# Altium PCB moto.PcbDoc
Units mil, origin at the board's own origin, x right, y up, seen from the top; angles counter-clockwise.
Board outline 6000 x 4000 mil, 2 copper layers (Top Layer, Bottom Layer); 13 components, 13 nets, 39 pads, 5 vias.
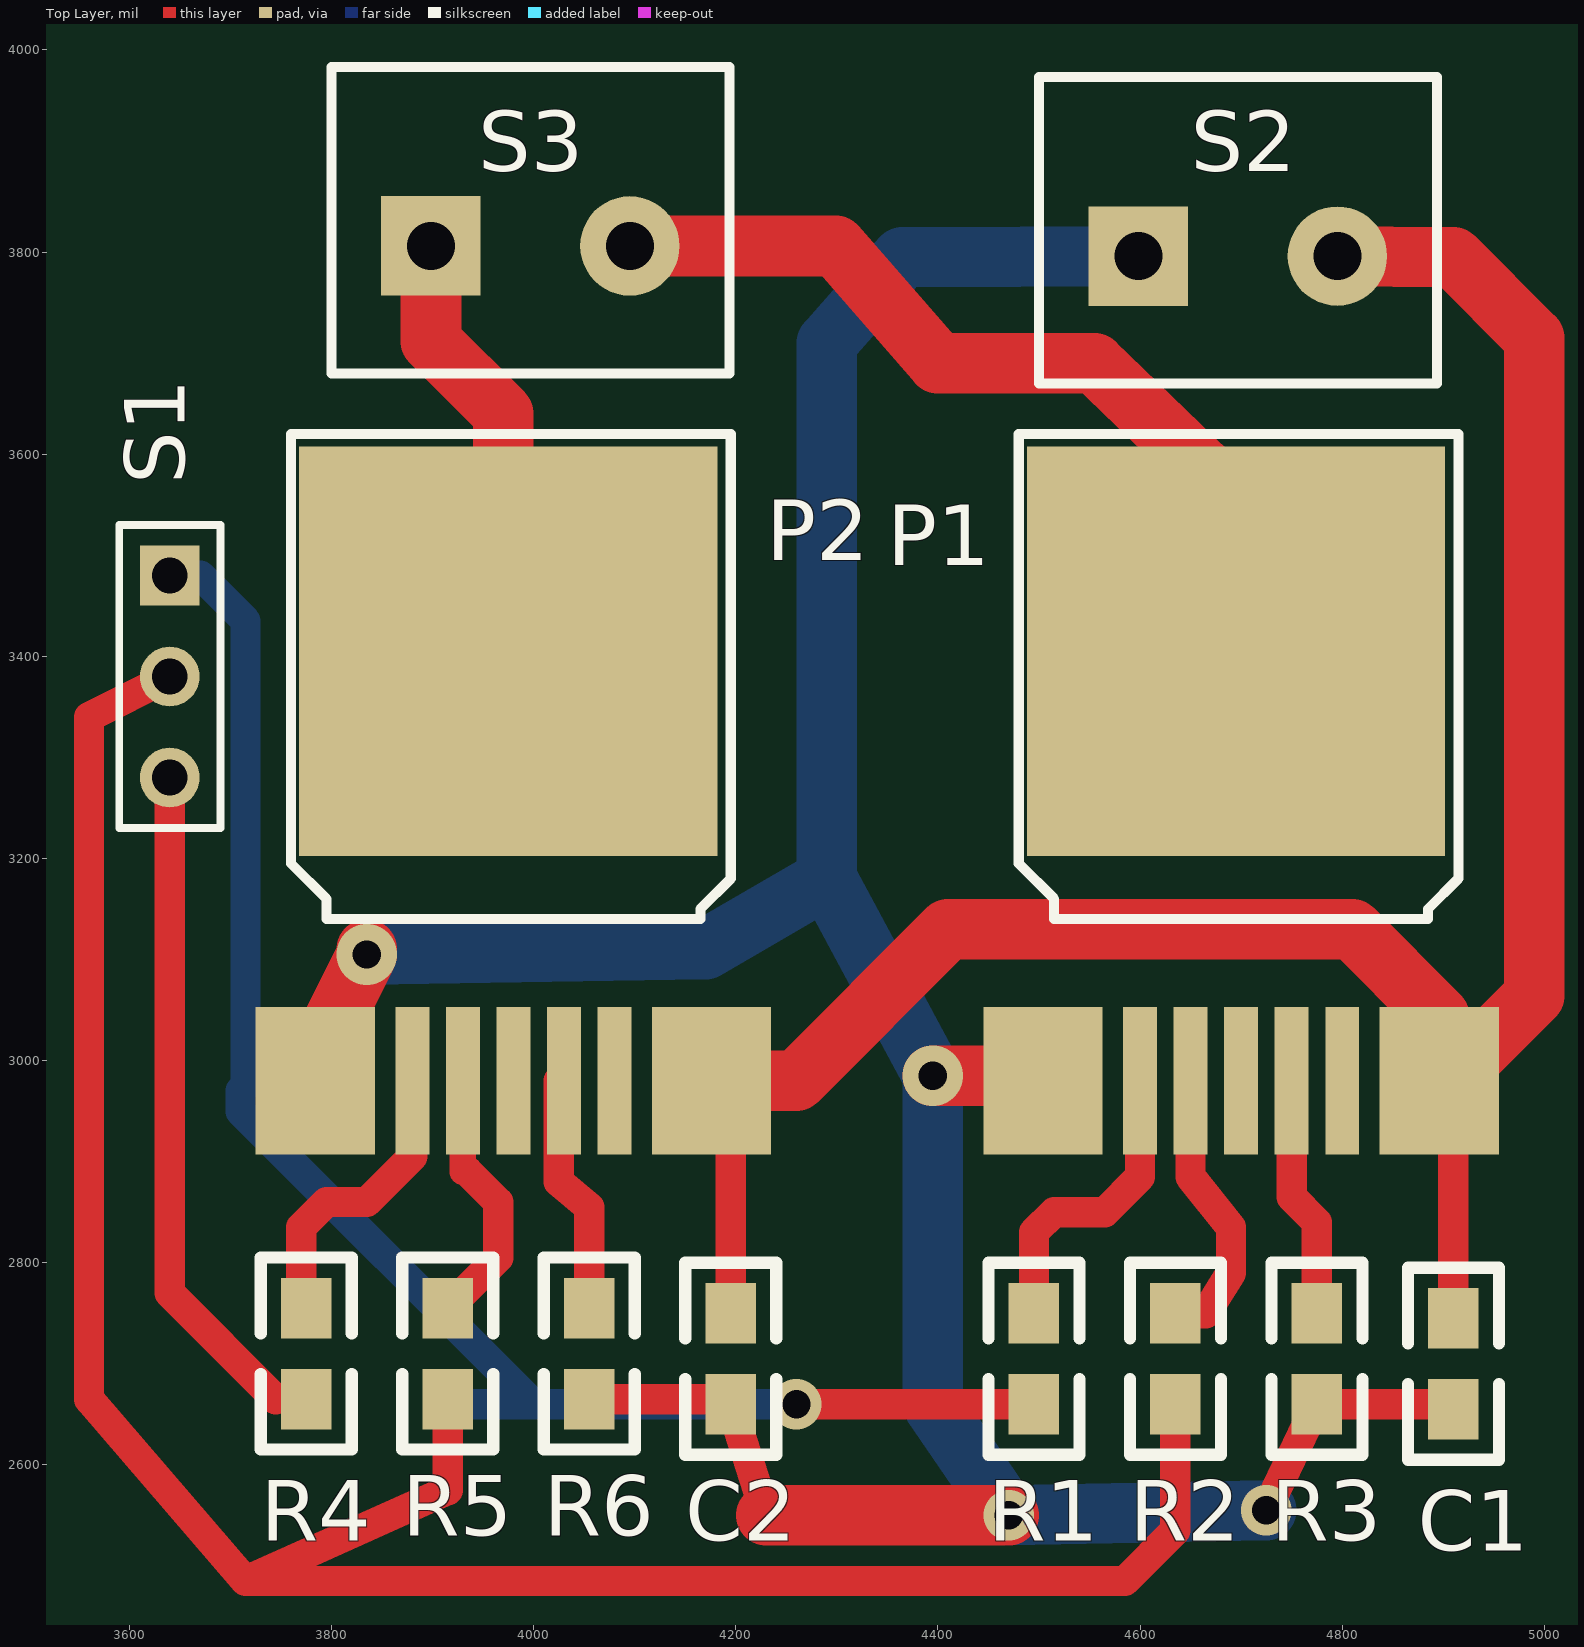
[diagram p0: Top Layer view]
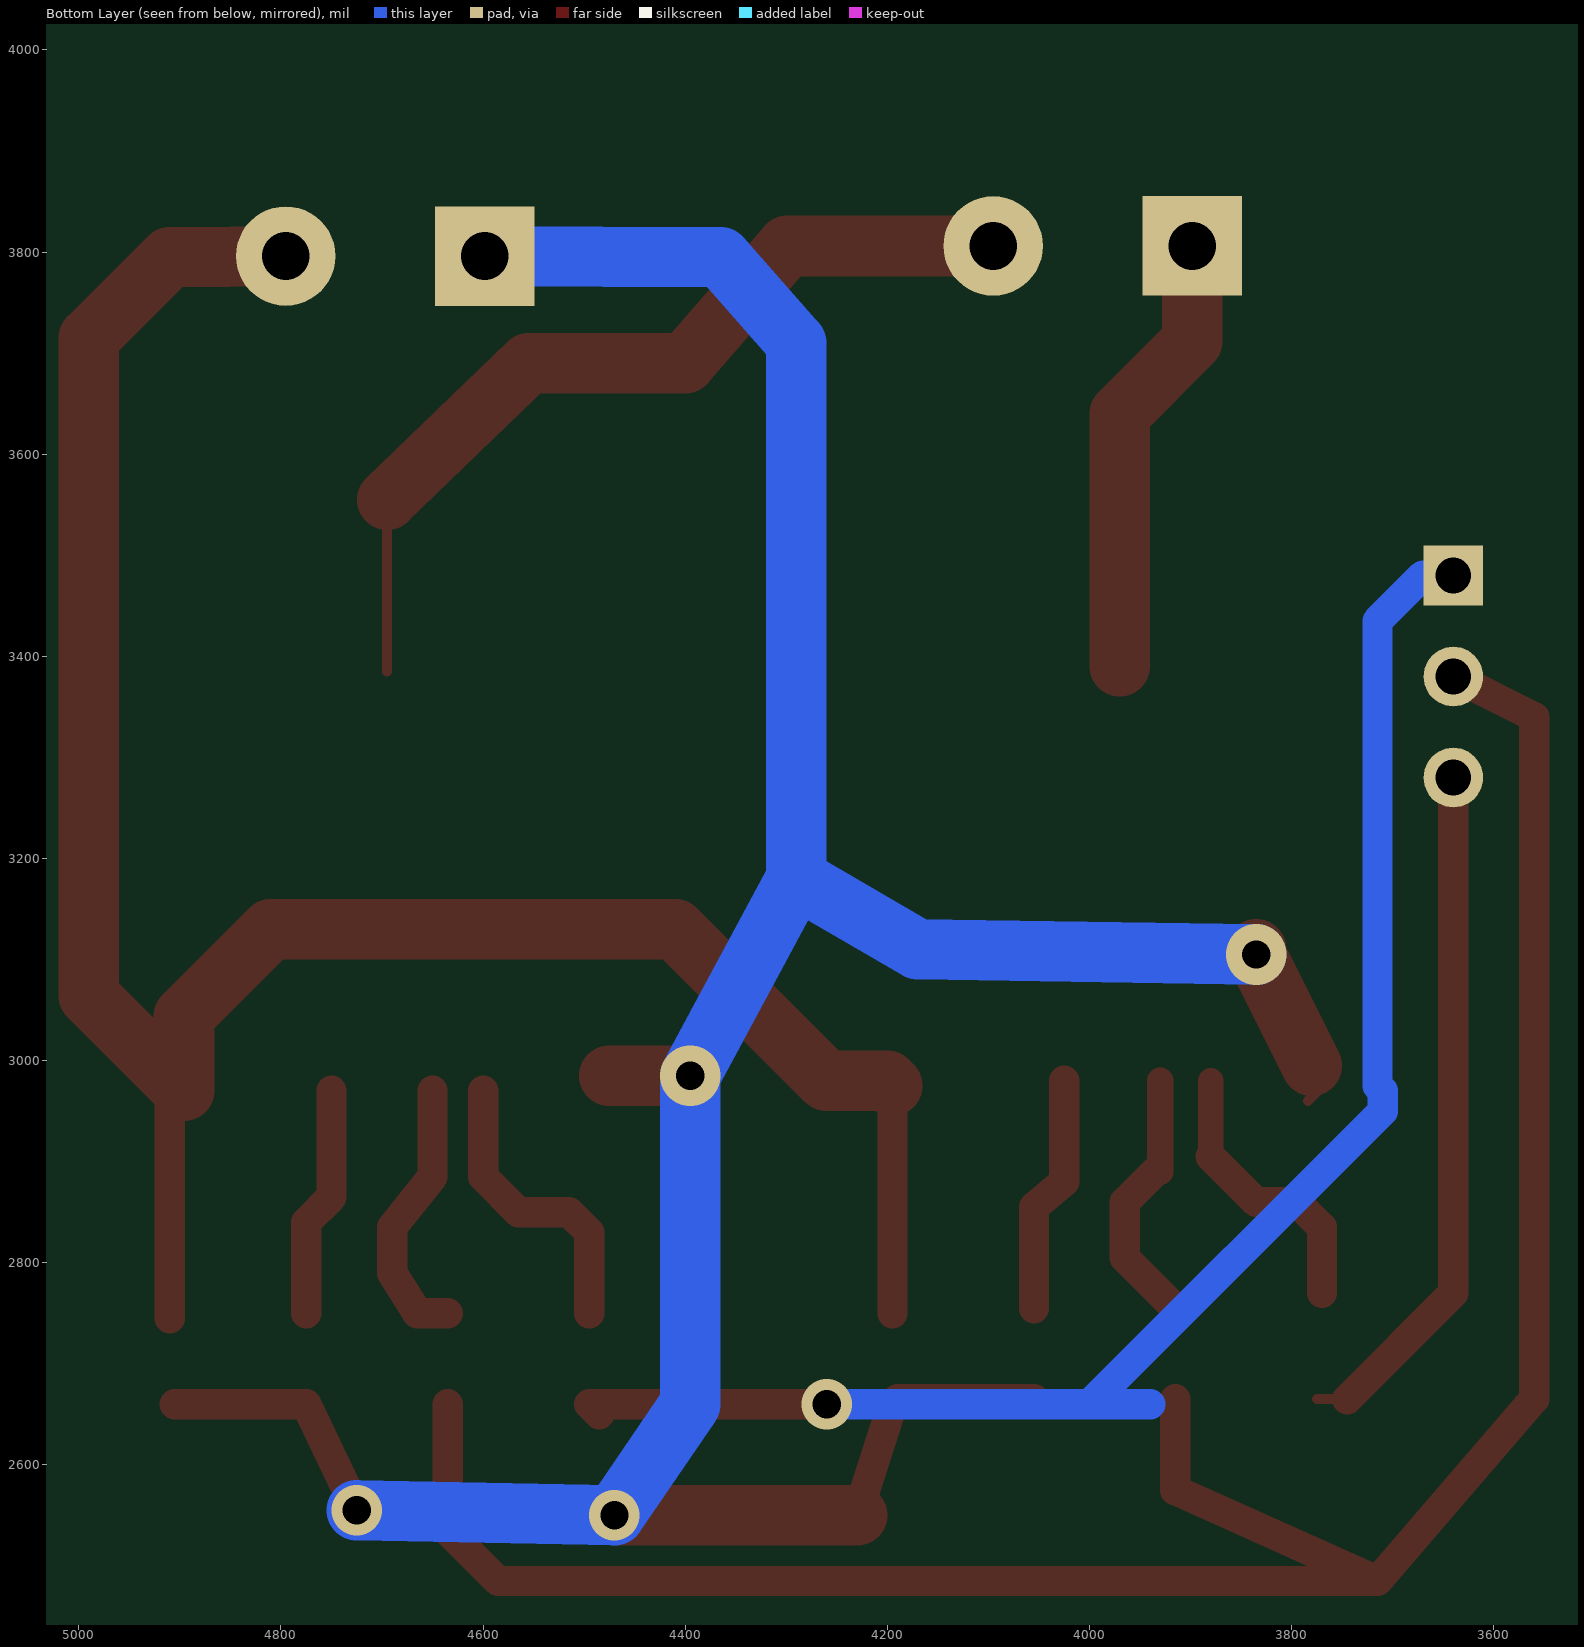
[diagram p1: Bottom Layer view, seen from below]

## Layer stack, top to bottom
Top Layer: signal copper 1.4
Dielectric: dielectric 12.6, FR-4, Dk 4.8
Bottom Layer: signal copper 1.4

## Board outline
1000,1000 7000,1000 7000,5000 1000,5000

## Design rules (kind name [scope] priority, off if disabled: settings)
Clearance Clearance_1 [All] p1: gap=10
Clearance [All] p2: gap=10
ComponentClearance [All] p1: gap=10 collisioncheckmode=3 verticalgap=10
PolygonConnect [All] p1: connectstyle=Relief reliefconductorwidth=10 reliefentries=4 polygonreliefangle="90 Angle"
RoutingVias [All] p1: holewidth=28 width=50 viastyle="Through Hole" minholewidth=28 minwidth=50 maxholewidth=28 maxwidth=50
SolderMaskExpansion [All] p1: expansion=4
TestPointUsage [All] p1: valid=0 allowmultiple=FALSE
Testpoint [All] p1: side=15 testpointundercomponent=TRUE minsize=40 maxsize=100 preferedsize=60 minholesize=0 maxholesize=40 preferedholesize=32 testpointgrid=1 style=1023 order=0123456789
Width [All] p1: maxlimit=70 minlimit=10 preferedwidth=10 toplayer_prefwidth=60 bottomlayer_prefwidth=30 minimp=50.000000 maximp=50.000000 favimp=50.000000
17 further rules are at their usual default settings.

## Components (designator, comment, footprint, x,y, rotation, side; value= is the part's Value field where it differs from the comment)
C1 "470nF" 0805 4910,2655 r90 top
C2 "470nF" 0805 4195,2660 r90 top
P1 "BTS7960" BTS7970B 4700,2980 r0 top
P2 "BTS7960" BTS7970B 3980,2980 r0 top
R1 "10K" 0805 4495,2660 r90 top
R2 "10K" 0805 4635,2750 r270 top
R3 "5.1K" 0805 4775,2750 r270 top
R4 "10K" 0805 3775,2665 r90 top
R5 "10K" 0805 3915,2755 r270 top
R6 "5.1K" 0805 4055,2755 r270 top
S1 "信号输入" HDR1X3 3640,3480 r270 top
S2 "电源" tongzhu 4500,3670 r0 top
S3 "电机" tongzhu 3800,3680 r0 top

## Footprints (in the part's own frame and the unit in brackets; to place one, negate y for a bottom-side part, rotate by r counter-clockwise, add the part's x,y. Pads: shape width x height; smd on the part's side, far side on the other; paste and mask are expansions set on the pad)
0805 [mil]
  rect 60x50 smd: 1(0,0) 2(90,0)
  silkscreen extent -50,-45 140,45
BTS7970B [mm]
  rect 3x3.7 smd: 1(-4.978,0) 7(4.978,0)
  rect 0.85x3.7 smd: 2(-2.54,0) 3(-1.27,0) 4(0,0) 5(1.27,0) 6(2.54,0)
  rect 10.514x10.3 smd: 8(-0.127,10.795)
  silkscreen extent -5.59,4.06 5.46,16.26
HDR1X3 [mm] "Connector; Header; 3 Position"
  rect 1.5x1.5 hole 0.9: 1(0,0)
  round 1.5 hole 0.9: 2(2.54,0) 3(5.08,0)
  silkscreen extent -1.27,-1.27 6.35,1.27
tongzhu [mm]
  rect 2.5x2.5 hole 1.2: 1(2.5,3.2)
  round 2.5 hole 1.2: 2(7.5,3.2)
  silkscreen extent 0,0 10,7.7

## Part data
C1 C2: library part Cap, "Capacitor"
P1 P2: library part "Header 8", "Header, 8-Pin"
R1 R2 R3 R4 R5 R6: library part Res2, "Resistor"
S1: library part "Header 3", "Header, 3-Pin"
S2 S3: library part "Header 2", "Header, 2-Pin"

## Via types
v1: diameter 50, hole 28, Top Layer to Bottom Layer, 3 vias
v2: diameter 60, hole 28, Top Layer to Bottom Layer, 2 vias

## Nets (pads, with @x,y where several pads share a name; then routed paths per layer and width w, separated by ;. In a path a pad name is that pad's centre, name@x,y a point inside that pad or via, vN(x,y) a via of type N, cw(c..) or ccw(c..) an arc to the next point about the centre after c; other vN are vias at no path point)
GND: C1.1 C2.1 P1.1 P2.1 R3.2 R6.2 S2.1 | length 3247.8
  Top Layer w10: P2.1@3775,2969 P2.1@3784,2960 ; C2.1@4195,2655 C2.1
  Top Layer w30: R6.2 C2.1@4190,2665 ; C2.1 4230,2550 ; v1(4725,2555) R3.2 C1.1@4905,2660
  Top Layer w60: P2.1@3780,2995 v2(3835,3105) v2@3835,3110 ; 4230,2550 v1(4470,2550) ; v2(4395,2985) P1.1@4475,2985
  Bottom Layer w60: v2(3835,3105) 4170,3110 4290,3180 ; S2.1 4365,3795 4290,3710 4290,3180 ; v1(4725,2555) v1(4470,2550) 4395,2660 v2(4395,2985) 4290,3180
I/O: R2.2 R5.2 S1.2 | length 2377
  Top Layer w30: S1.2 3560,3340 3560,2665 3715,2485 ; R5.2 3915,2575 3715,2485 ; R2.2 4635,2535 4585,2485 3715,2485
MOTO1: P1.8 S3.2 | length 877
  Top Layer w10: P1.8@4695,3385 P1.8@4695,3555
  Top Layer w60: S3.2 4299.02,3805.98 4400,3690 4555,3690 P1.8@4695,3555
MOTO2: P2.8 S3.1 | length 445.6
  Top Layer w60: S3.1 3898.43,3711.57 3970,3640 3970,3555 P2.8@3970,3390
P1-2: P1.2 R1.2 | length 292.8
  Top Layer w30: R1.2 4495,2830 4515,2850 4565,2850 4600,2885 P1.2@4600,2970
P1-3: P1.3 R2.1 | length 271.2
  Top Layer w30: R2.1 4665,2750 4690,2790 4690,2835 4650,2885 P1.3@4650,2970
P1-5: P1.5 R3.1 | length 230.4
  Top Layer w30: P1.5@4750,2970 4750,2865 4775,2840 R3.1
P2-2: P2.2 R4.2 | length 279
  Top Layer w25: 3880,2905 P2.2
  Top Layer w30: R4.2@3770,2770 3770,2835 3795,2860 3835,2860 3880,2905
P2-3: P2.3 R5.1 | length 258.1
  Top Layer w26: 3930,2890 P2.3
  Top Layer w30: R5.1 3965,2805 3965,2860 3935,2890
P2-5: P2.5 R6.1 | length 239.1
  Top Layer w30: P2.5@4025,2980 4025,2880 4055,2855 R6.1
PWM1: R1.1 S1.1 | length 1560
  Top Layer w30: v1(4260,2660) R1.1 R1.1@4485,2650
  Bottom Layer w10: S1.1 3670,3480
  Bottom Layer w30: 3670,3480 3715,3435 3715,2975 3710,2970 3710,2950 4000,2660 ; 3940,2660 v1(4260,2660)
PWM2: R4.1 S1.3 | length 688.5
  Top Layer w10: 3745,2665 R4.1
  Top Layer w30: S1.3 3640,2770 3745,2665
VCC: C1.2 C2.2 P1.7 P2.7 S2.2 | length 2322.6
  Top Layer w30: C2.2 4195,2810 P2.7@4195,2975 ; C1.2 P1.7@4910,2956
  Top Layer w60: P2.7@4195,2975 4200,2980 4260,2980 4410,3130 4810,3130 4896,3044 4896,2970 4990,3064 4990,3715 4910,3795 4905,3795 S2.2
pads on no net: P1.4 P1.6 P2.4 P2.6